# EAGLE board tracksoar shield (EAGLE 7.2.0)
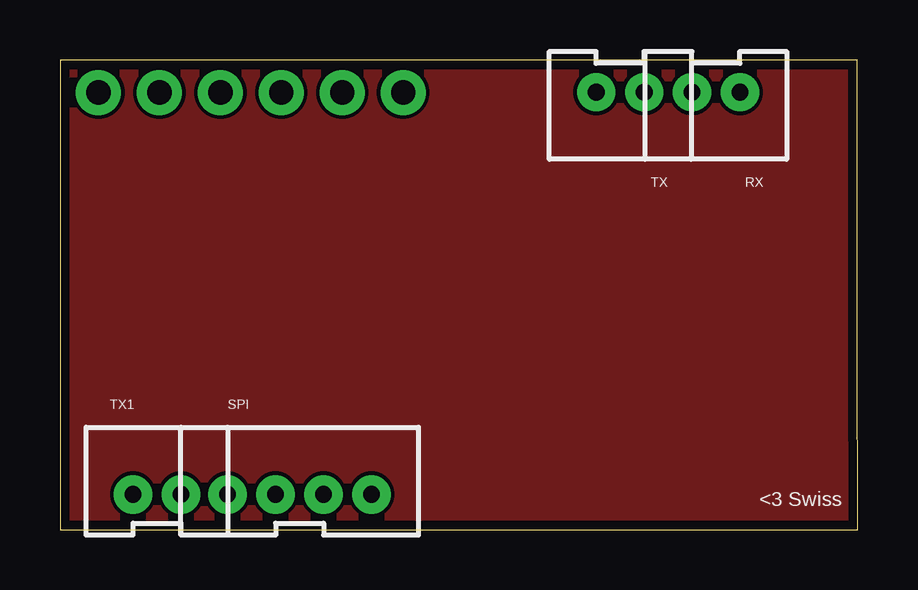
[diagram p0: board, top side]
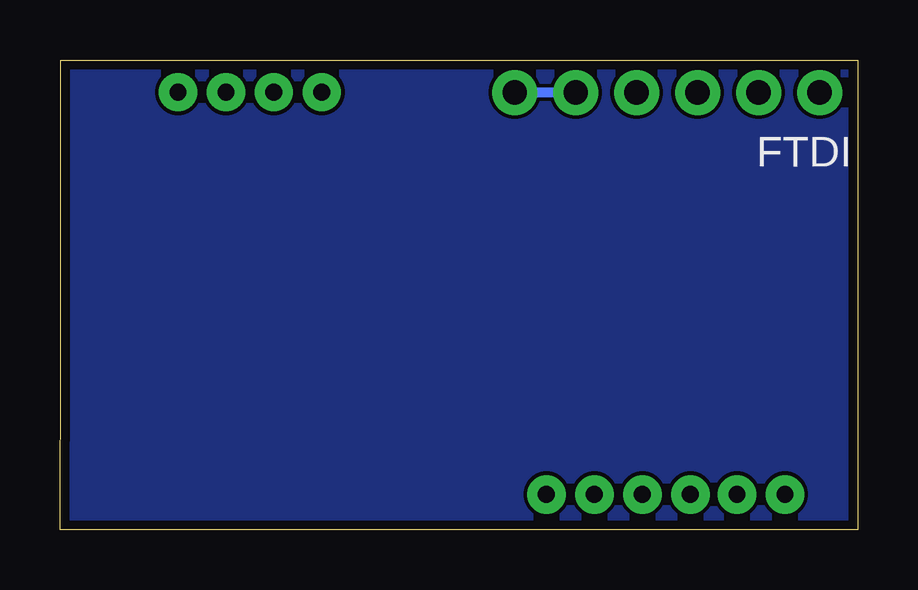
[diagram p1: board, bottom side, seen from below]

Size 33.25 x 19.6 mm. Coordinates in mm from the lower left corner, seen from the top.
Outline: 0,0 33.25,0 33.25,3.73 33.22,3.79 33.22,3.83 33.22,19.6 0,19.6 0,0
Copper layers (1*16): Top 0.0356mm / dielectric 1.5011mm / Bottom 0.0356mm
Design rules "oshpark-2layer": minimum track width 6mil, minimum drill 13mil, track to track 6mil, track to pad 6mil, pad to pad 6mil, via to via 6mil, smd to smd 6mil, copper to edge 15mil, drill to drill 6mil, minimum pad ring 7mil, minimum via ring 7mil, stop-mask expansion 4mil, vias tented up to drill 0mil, thermal gap 10mil

## Footprints (pad centres in the part's own frame; a part is rotated, then mirrored left to right if it is on the bottom)
1X06_NO_SILK = drill 1.016 pad 1.88: 1 0,0; 2 2.54,0; 3 5.08,0; 4 7.62,0; 5 10.16,0; 6 12.7,0
JST-2-PTH-VERT = drill 0.7 pad 1.6: 1 -1,-0.55; 2 1,-0.55
JST-4-PTH-VERT = drill 0.7 pad 1.6: 1 -3,-0.55; 2 -1,-0.55; 3 1,-0.55; 4 3,-0.55

## Placement (x,y rotation side)
FRAME1  FRAME-LETTER  [CREATIVE_COMMONS]  4.27,-7.77 0 top  (outside the outline)
FTDI  [1X06_NO_SILK]  1.6,18.24 180 bottom
RX  RX  [JST-2-PTH-VERT]  27.33,17.7 180 top
SPI  [JST-4-PTH-VERT]  9.98,2.03 0 top
TX  TX  [JST-2-PTH-VERT]  23.34,17.7 180 top
TX1  TX  [JST-2-PTH-VERT]  4.04,2.03 0 top

## Library data of the parts
FRAME1 = SparkFun-Aesthetics
FTDI = SparkFun-Connectors; PROD_ID: CONN-08437
RX SPI TX TX1 = SparkFun-Connectors

## Nets
DTR: FTDI.1
GND: FTDI.5 FTDI.6
MISO: SPI.2
MOSI: SPI.3
RX: TX.2
RX1: RX.1
RXO: FTDI.2
SCK: SPI.1
SCL: TX1.1
SDA: TX1.2
SS: SPI.4
TX: TX.1
TX1: RX.2
TXO: FTDI.3
VCC: FTDI.4

## Tracks (layer width: path | path; a pad name or v marks a point on that pad's centre or on a via)
GND
  Bottom 0.406: FTDI.5 FTDI.6
N$1
  pour Bottom: -0.03,19.58 33.27,19.58 33.27,0 -0.03,0
N$2
  pour Top: -0.03,19.58 33.27,19.58 33.27,0 -0.03,0

## Text on the board
tNames: <3 Swiss